# Altium PCB Test.PcbDoc (part 1 of 3)
Units mil, origin at the board's own origin, x right, y up, seen from the top; angles counter-clockwise.
Board outline 6000 x 4000 mil, 2 copper layers (Top Layer, Bottom Layer); 135 components, 102 nets, 575 pads, 1 vias.
Unrouted connection lines stored in the file: 317.
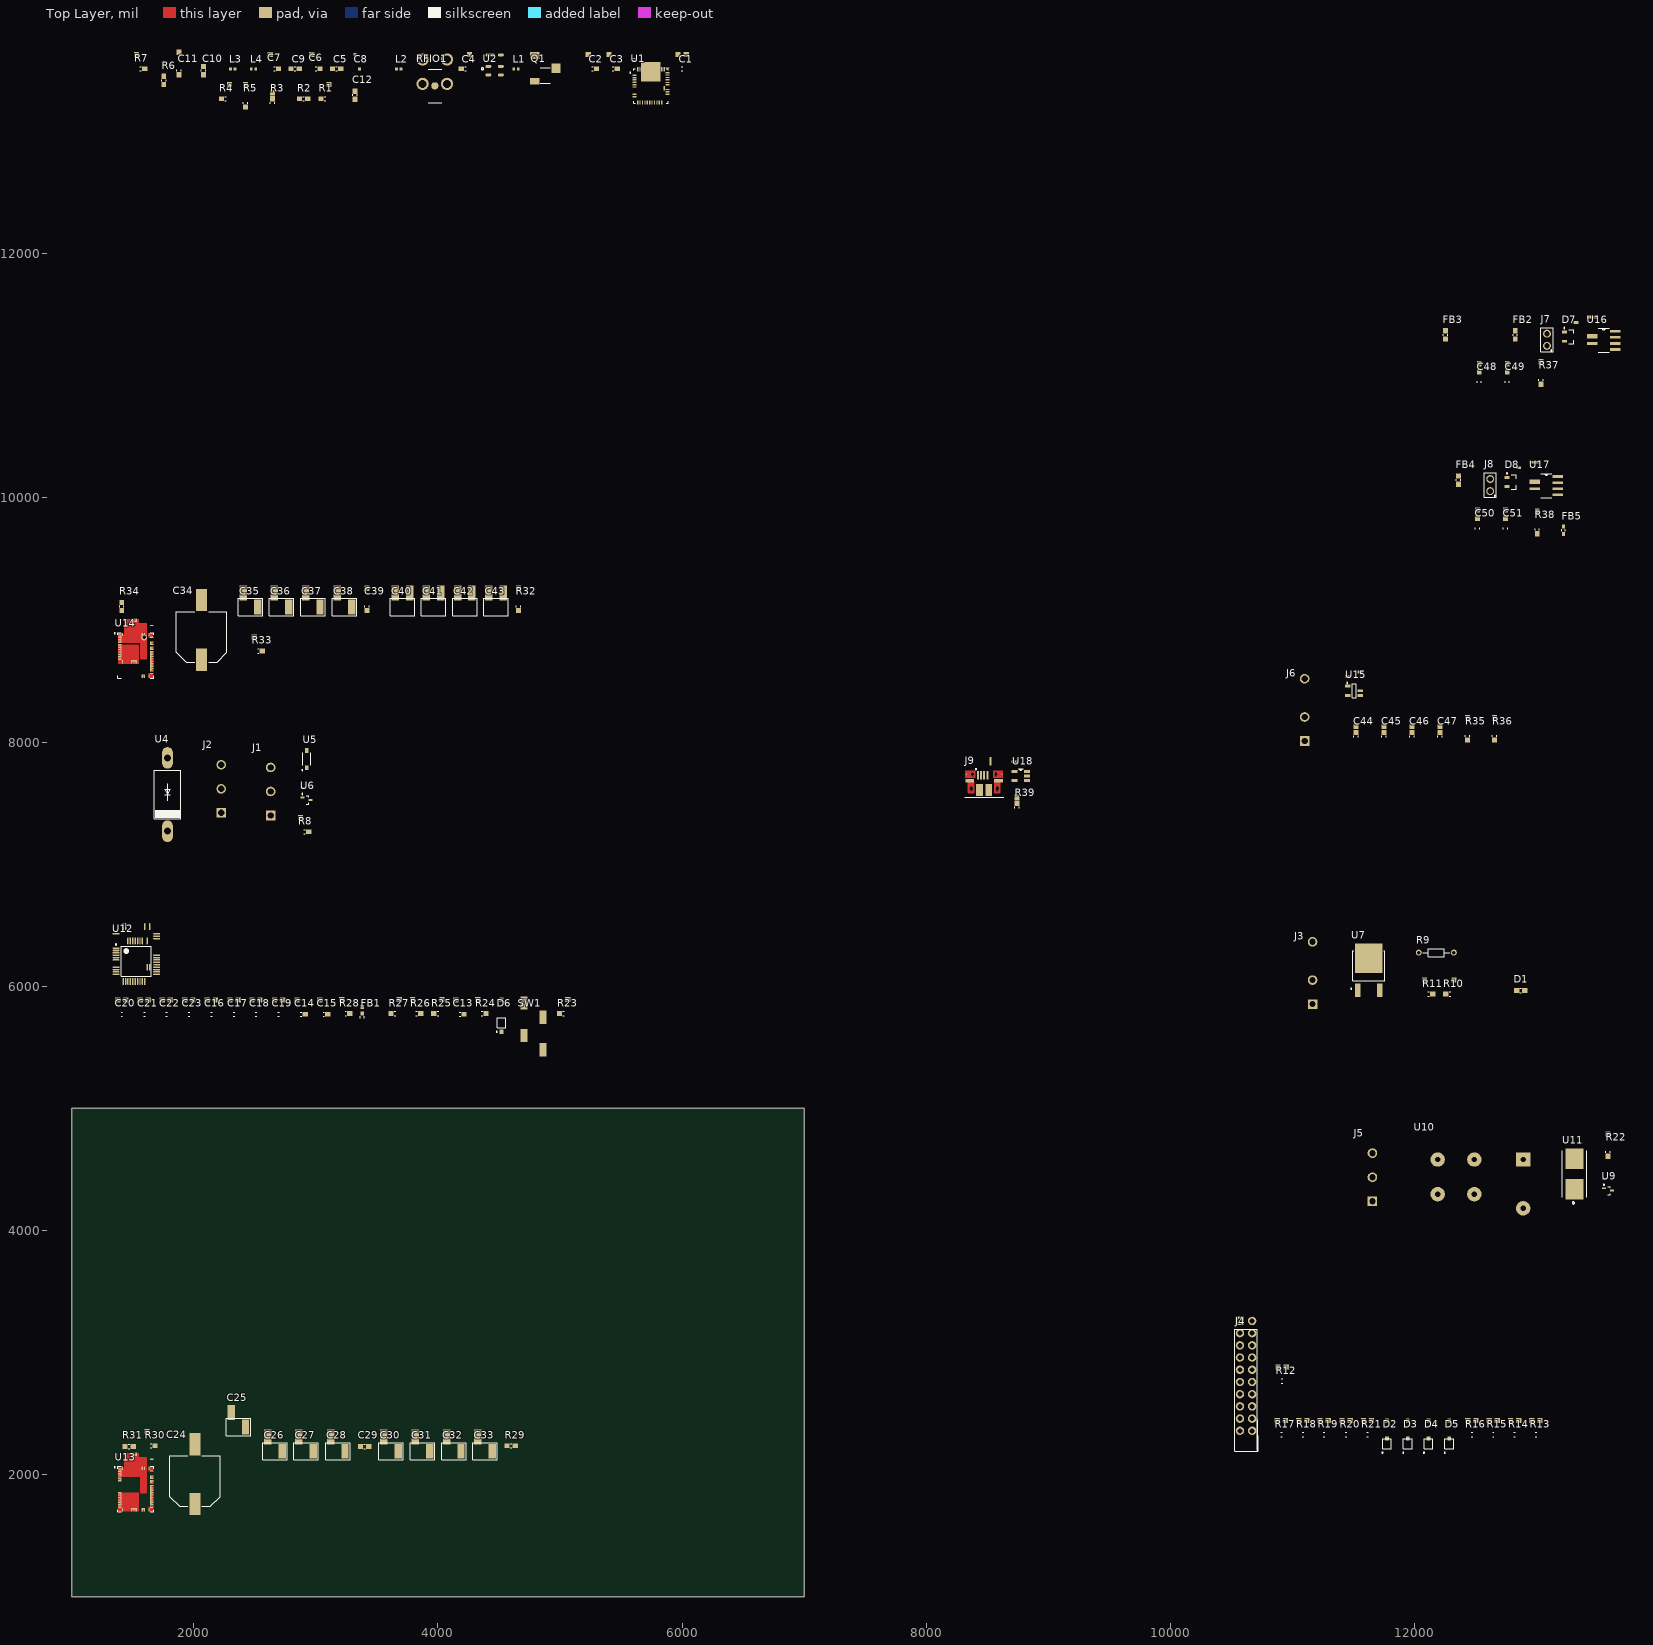
[diagram p0: Top Layer view]
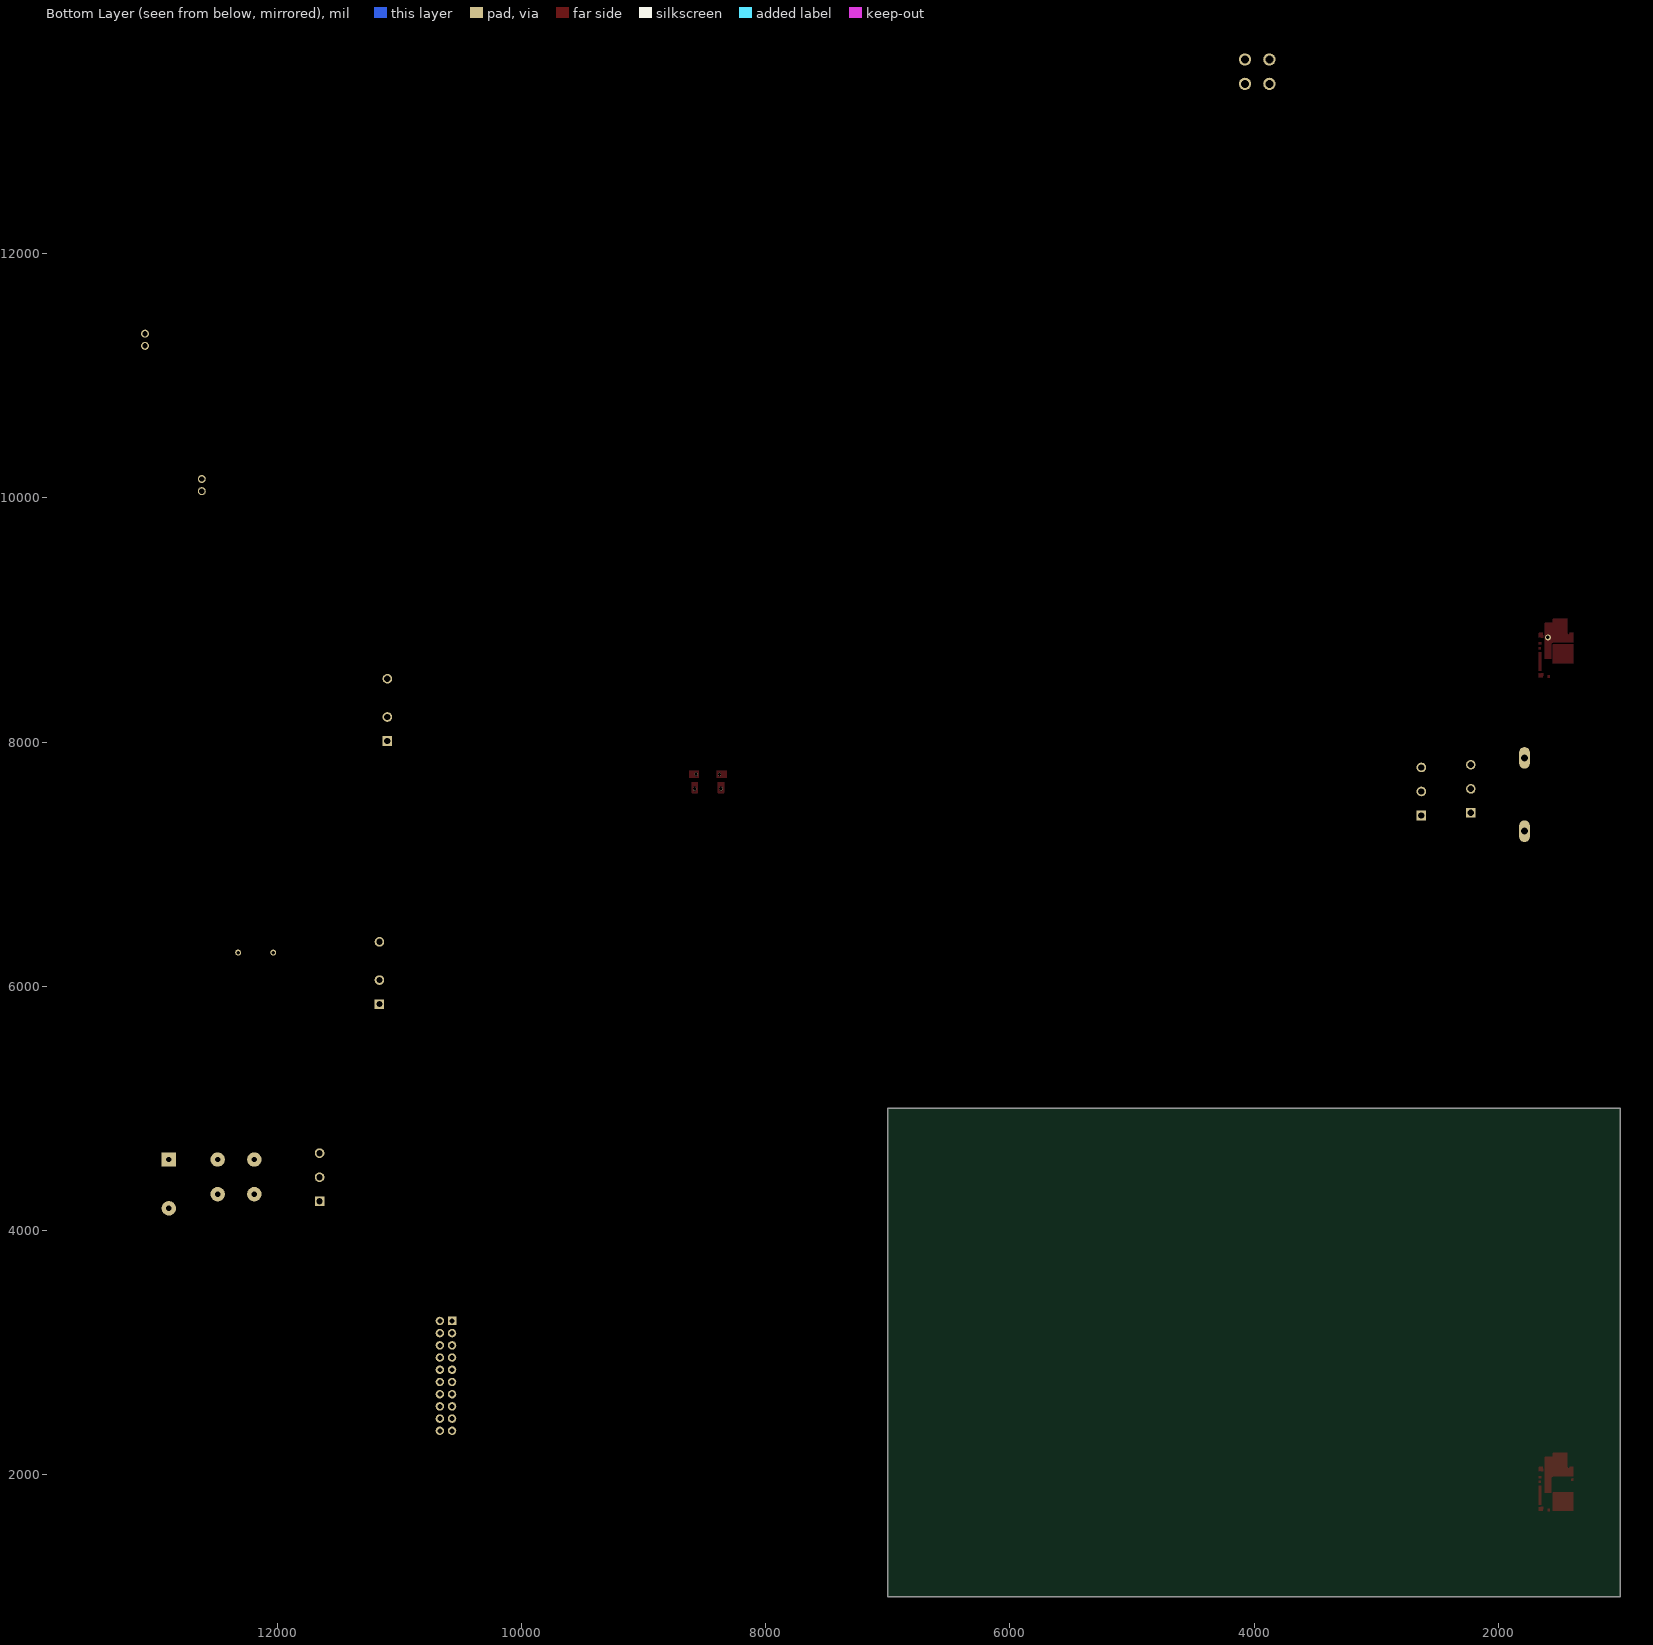
[diagram p1: Bottom Layer view, seen from below]

## Layer stack, top to bottom
Top Solder: solder mask 0.4, Solder Resist, Dk 3.5
Top Layer: signal copper 1.4
Dielectric 1: dielectric 12.6, FR-4, Dk 4.8
Bottom Layer: signal copper 1.4
Bottom Solder: solder mask 0.4, Solder Resist, Dk 3.5

## Board outline
1000,1000 7000,1000 7000,5000 1000,5000

## Design rules (kind name [scope] priority, off if disabled: settings)
Clearance [All] p1: gap=5 ignorepadtopadclearanceinfootprint=TRUE
MatchedLengths "Schematic Matched Net Lengths" [InNetClass('USBCLASS')] p1: tolerance=1 checknetsindiffpair=TRUE checkdiffpairvsdiffpair=FALSE checkxsignals=FALSE checkothers=FALSE
PolygonConnect [All] p1: connectstyle=Relief reliefconductorwidth=10 reliefentries=4 polygonreliefangle="90 Angle" airgapwidth=10
RoutingVias [All] p1: holewidth=28 width=50 viastyle="Through Hole" minholewidth=28 minwidth=50 maxholewidth=28 maxwidth=50
SolderMaskExpansion [All] p1: expansion=4
Width [All] p1: maxlimit=10 minlimit=10 preferedwidth=10
30 further rules are at their usual default settings.

## Classes and differential pairs
net class USBOCLASS: NetJ9_2 NetJ9_3
net class USBCLASS: NetU12_32 NetU12_33
component class USB: J6 R39 U18
component class Thermocouple: C30 C49 C50 C51 D2 D5 D6 FB1 FB2 FB3 FB4 J5 J6 J7 R28 R38 U16 U18
component class RFDesign: C1 C2 C3 C4 C5 C6 C7 C8 C9 C10 C11 C12 L1 L2 L3 L4 Q1 R4 R6 R7 R8 R10 R11 R12 RFIO1 U1 U2
component class PressureSensor: C28 C44 C45 C47 J6 R30 R39 U15
component class Power: C13 C14 C17 C20 C23 C28 C30 C33 C34 C36 C37 C39 C40 C42 C43 C44 C45 C46 C47 C48 C49 C50 R21 R28 R29 R30 R34 R39 U14 U15
component class MCU: C13 C14 C17 C20 C22 C23 C32 C33 C36 C37 C39 C40 C42 D6 R17 R21 R24 R25 R28 R29 R39 SW1 SW? U12
component class LightRelay: J7 R16 U9 U10 U11
component class JTAG: D2 D4 D5 D6 J4 R10 R13 R15 R16 R17 R18 R19 R21 R24 R25 R27 R39
component class InductiveSensor: D1 J3 R2 R4 R10 U7
component class FanPWM: J1 J2 R8 U4 U5 U6

## Components (designator, comment, footprint, x,y, rotation, side; value= is the part's Value field where it differs from the comment)
C1 "1uf_10V_0603" 0603#1 6000,13515 r0 top
C2 "1uf_10V_0603" 0603#2 5265,13515 r0 top
C3 "220nF_25V_0603" 0603#2 5435,13515 r0 top
C4 "NC_0603" 0603#3 4225,13515 r0 top
C5 "22pF_50V_0603" 0603#4 3170,13515 r0 top
C6 "1.8pF_50V_0603" 0603#2 3000,13515 r0 top
C7 "NC_0603" 0603#2 2660,13515 r0 top
C8 "Cap" 0402#1 3340,13515 r0 top value=4.7uf
C9 "680pF_50V_0603" 0603#4 2830,13515 r0 top
C10 "47nF_50V_0603" 0603#4 2080,13500 r90 top
C11 "100nF_50V_0603" 0603#5 1880,13500 r90 top
C12 "10nF_50V_0603" 0603#4 3320,13298.46 r90 top
C13 "100nF_50V_0603" 0603#2 4180,5770 r0 top
C14 "1uf_10V_0603" 0603#2 2880,5770 r0 top
C15 "100nF_50V_0603" 0603#2 3065,5770 r0 top
C16 "100nF_50V_0603" 0603#1 2145,5770 r0 top
C17 "100nF_50V_0603" 0603#1 2330,5770 r0 top
C18 "100nF_50V_0603" 0603#1 2510,5770 r0 top
C19 "100nF_50V_0603" 0603#1 2695,5770 r0 top
C20 "1uf_10V_0603" 0603#1 1410,5770 r0 top
C21 "1uf_10V_0603" 0603#1 1595,5770 r0 top
C22 "1uf_10V_0603" 0603#1 1775,5770 r0 top
C23 "1uf_10V_0603" 0603#1 1960,5770 r0 top
C24 "100uF_50V_smd_NC" CAPAE120103X105M 2010,1945 r90 top
C25 "10uF_50V_1210" 1210#1 2365,2390 r0 top
C26 "10uF_50V_1210" 1210#1 2665,2190 r0 top
C27 "4.7uf_50V_1210" 1210#1 2920,2190 r0 top
C28 "4.7uf_50V_1210" 1210#1 3180,2190 r0 top
C29 "100pF_50V_0603" 0603#4 3400,2230 r0 top
C30 "22uF_25V_1210" 1210#1 3615,2190 r0 top
C31 "22uF_25V_1210" 1210#1 3875,2190 r0 top
C32 "22uF_25V_1210" 1210#1 4130,2190 r0 top
C33 "22uF_25V_1210" 1210#1 4385,2190 r0 top
C34 "100uF_50V_smd_NC" CAPAE120103X105M 2065,8860 r90 top
C35 "10uF_50V_1210" 1210#1 2465,9105 r0 top
C36 "10uF_50V_1210" 1210#1 2720,9105 r0 top
C37 "4.7uf_50V_1210" 1210#1 2975,9105 r0 top
C38 "4.7uf_50V_1210" 1210#1 3235,9105 r0 top
C39 "150pF_50V_0603" 0603#5 3420,9110 r90 top
C40 "22uF_25V_1210" 1210#2 3710,9105 r0 top
C41 "22uF_25V_1210" 1210#2 3965,9105 r0 top
C42 "22uF_25V_1210" 1210#2 4220,9105 r0 top
C43 "47uF_16V_1210" 1210#2 4475,9105 r0 top
C44 "10nF_50V_0603" 0603#6 11520,8045 r90 top
C45 "100nF_50V_0603" 0603#6 11750,8045 r90 top
C46 "NC_0603" 0603#6 11980,8045 r90 top
C47 "NC_0603" 0603#6 12210,8045 r90 top
C48 "NC_0603" 0603#7 12530,10950 r90 top
C49 "100nF_50V_0603" 0603#7 12760,10950 r90 top
C50 "NC_0603" 0603#7 12515,9750 r90 top
C51 "100nF_50V_0603" 0603#7 12745,9750 r90 top
D1 "LTST-C191KRKT" 0603#4 12870,5965 r0 top
D2 "MMSZ5V1T1G" SOIC127P370X94-2N#1 11775,2251.38 r90 top
D3 "MMSZ5V1T1G" SOIC127P370X94-2N#1 11945,2251.38 r90 top
D4 "MMSZ5V1T1G" SOIC127P370X94-2N#1 12115,2251.38 r90 top
D5 "MMSZ5V1T1G" SOIC127P370X94-2N#1 12285,2251.38 r90 top
D6 "MMSZ5V1T1G" SOIC127P370X94-2N#2 4520,5700 r90 top
D7 "SZNUP2105LT1G" SOT-23-3 13275,11320 r0 top
D8 "SZNUP2105LT1G" SOT-23-3 12805,10130 r0 top
FB1 "600OHM_100MHz" 0603#8 3380,5745 r90 top
FB2 "470OHM_100MHZ" 0603#4 12825,11335 r90 top
FB3 "470OHM_100MHZ" 0603#4 12255,11335 r90 top
FB4 "470OHM_100MHZ" 0603#4 12360,10145 r90 top
FB5 "470OHM_100MHZ" 0603#9 13220,9735 r90 top
J1 "3PinTerminalBlock" "3 POS 5mm Pitch"#1 2630,7398.15 r90 top
J2 "3PinTerminalBlock" "3 POS 5mm Pitch"#1 2225,7420 r90 top
J3 "3PinTerminalBlock" "3 POS 5mm Pitch"#2 11165,5853.15 r90 top
J4 "20Pin JTag" DIP20 10570,3141.38 r0 top
J5 "3PinTerminalBlock" "3 POS 5mm Pitch"#1 11655,4238.15 r90 top
J6 "3PinTerminalBlock" "3 POS 5mm Pitch"#2 11100,8008.15 r90 top
J7 "2PinTerminalBlock" "2 Pos 2.54mm Pitch" 13085,11295 r90 top
J8 "2PinTerminalBlock" "2 Pos 2.54mm Pitch" 12620,10105 r90 top
J9 "USB MICRO B" 10103594-0001LF 8475,7616.54 r0 top
L1 "100nH_0402" 0402#2 4640,13515 r0 top
L2 "8.2nH_0402_Q8" 0402#2 3680,13515 r0 top
L3 "8.2nH_0402" 0402#2 2320,13515 r0 top
L4 "8.2nH_0402" 0402#2 2490,13515 r0 top
Q1 "Crystal_12_8" "4-SMD No Lead" 4880,13460 r0 top
R1 "100k_0603" 0603#3 3075,13270 r0 top
R2 "NC_0603" 0603#4 2900,13270 r0 top
R3 "NC_0603" 0603#6 2645,13235 r90 top
R4 "10k_0603" 0603#3 2260,13270 r0 top
R5 "10k_0603" 0603#5 2425,13235 r90 top
R6 "6.8k_0603" 0603#4 1755,13420 r90 top
R7 "1_0603" 0603#2 1565,13515 r0 top
R8 "110_0603" 0603#2 2908.46,7265 r0 top
R9 "560_7.3mmTH" "7.3mm Through Hole" 12178.7,6275 r180 top
R10 "NC_0603" 0603#3 12290,5935 r0 top
R11 "68_0603" 0603#2 12115,5935 r0 top
R12 "NC_0603" 0603#1 10915,2765 r0 top
R13 "22_0603" 0603#1 12995,2326.38 r0 top
R14 "22_0603" 0603#1 12820,2326.38 r0 top
R15 "22_0603" 0603#1 12645,2326.38 r0 top
R16 "22_0603" 0603#1 12470,2326.38 r0 top
R17 "10k_0603" 0603#1 10910,2326.38 r0 top
R18 "10k_0603" 0603#1 11085,2326.38 r0 top
R19 "10k_0603" 0603#1 11260,2326.38 r0 top
R20 "10k_0603" 0603#1 11440,2326.38 r0 top
R21 "10k_0603" 0603#1 11615,2326.38 r0 top
R22 "10_0603" 0603#5 13585,4640 r90 top
R23 "NC_0603" 0603#3 5030,5775 r0 top
R24 "22_0603" 0603#2 4360,5775 r0 top
R25 "22_0603" 0603#3 4000,5775 r0 top
R26 "NC_0603" 0603#2 3825,5775 r0 top
R27 "10k_0603" 0603#3 3650,5775 r0 top
R28 "10k_0603" 0603#2 3245,5775 r0 top
R29 "40.2K_0603" 0603#4 4600,2235 r0 top
R30 "88.7K_0603" 0603#2 1650,2235 r0 top
R31 "10k_0603" 0603#4 1470,2230 r0 top
R32 "23.2k_0603" 0603#5 4660,9110 r90 top
R33 "133k_0603" 0603#2 2528.46,8745 r0 top
R34 "10k_0603" 0603#4 1410,9110 r90 top
R35 "10k_0603" 0603#5 12435,8050 r90 top
R36 "10k_0603" 0603#5 12655,8050 r90 top
R37 "10k_0603" 0603#5 13035,10965 r90 top
R38 "10k_0603" 0603#5 13005,9740 r90 top
R39 "15k_0603" 0603#6 8745,7465 r90 top
RFIO1 "SMA Straight PCB" "SMA Straight PCB" 3975,13375 r0 top
SW1 "B3SN-3012P" B3SN-3012P 4775,5610 r90 top
U1 "SX1211" ADF7021BCPZ 5745,13375 r0 top
U2 "B39871B3715U410" B39871B3715U410 4465,13465 r0 top
U4 "SB5100" SB5100 1785,7570 r90 top
U5 "1N5819HW-7-F" 1N5819HW-7-F 2925,7860.87 r90 top
U6 "DMG1012T-7" DMG1012T-7 2923.46,7525.31 r0 top
U7 "N-Mosfet" FQD1N80TM 11625,6130 r0 top
U9 "DMG1012T-7" DMG1012T-7 13585,4325 r0 top
U10 "G6C-2114P-US" G6C-2114P-US 12890,4580 r270 top
U11 "2A_125VAC" 2410 13310,4460.59 r90 top
U12 "STM32L4" TSQFP50P900X900X160-48N 1530,6205 r0 top
U13 "LMZM33602" QFN50P700X900X410_HS-55N#1 1525,1880 r0 top
U14 "LMZM33602" QFN50P700X900X410_HS-55N#2 1525,8710 r0 top
U15 "ADS1100A0IDBVR" ADS1100A0IDBVR 11505,8420 r0 top
U16 "MAX31855KASA+T" MAX31855KASA+T 13550,11290 r0 top
U17 "MAX31855KASA+T" MAX31855KASA+T 13080,10100 r0 top
U18 "TPD2S017DBVR" SOT95P280X145-6N 8775,7721.54 r0 top

## Footprints (in the part's own frame and the unit in brackets; to place one, negate y for a bottom-side part, rotate by r counter-clockwise, add the part's x,y. Pads: shape width x height; smd on the part's side, far side on the other; paste and mask are expansions set on the pad)
1N5819HW-7-F [mm]
  rect 1x0.75 smd: A(1.8,0) C(-1.8,0)
  silkscreen extent -2.4,-0.8 1.35,0.97
"2 Pos 2.54mm Pitch" [mm]
  round 1.65 hole 1.1: 1(-1.27,0) 2(1.27,0)
  silkscreen extent -2.54,-1.27 2.54,1.27
"3 POS 5mm Pitch"#1 [mm]
  rect 2x2 hole 1.3: 1(0,0)
  round 2 hole 1.3: 2(5,0) 3(10,0)
"3 POS 5mm Pitch"#2 [mm]
  rect 2x2 hole 1.3: 1(0,0)
  round 2 hole 1.3: 2(5,0) 3(12.956,0)
"4-SMD No Lead" [mm]
  rect 1.9x1.4 smd: 1(-2.2,-1.2) 2(2.2,1.756) 3(2.2,1.2) 4(-2.2,4.156)
  silkscreen extent -1.05,-1.65 1.05,1.65
"7.3mm Through Hole" [mm]
  round 1.238 hole 0.73: 1(-3.65,0) 2(3.65,0)
  silkscreen extent -2.8,-0.85 2.8,0.85
0402#1 [mm]
  rect 0.58x0.62 smd: 1(-0.47,2.956) 2(0.47,0)
0402#2 [mm]
  rect 0.58x0.62 smd: 1(-0.47,0) 2(0.47,0)
0603#1 [mm]
  rect 1.1x1 smd: 1(-0.85,2.956) 2(0.85,2.956)
  silkscreen extent -0.15,-0.45 0.15,0.45
0603#2 [mm]
  rect 1.1x1 smd: 1(-0.85,2.956) 2(0.85,0)
  silkscreen extent -0.15,-0.45 0.15,0.45
0603#3 [mm]
  rect 1.1x1 smd: 1(-0.85,0) 2(0.85,2.956)
  silkscreen extent -0.15,-0.45 0.15,0.45
0603#4 [mm]
  rect 1.1x1 smd: 1(-0.85,0) 2(0.85,0)
  silkscreen extent -0.15,-0.45 0.15,0.45
0603#5 [mm]
  rect 1.1x1 smd: 1(-0.85,0) 2(3.806,0)
  silkscreen extent -0.15,-0.45 0.15,0.45
0603#6 [mm]
  rect 1.1x1 smd: 1(2.106,0) 2(0.85,0)
  silkscreen extent -0.15,-0.45 0.15,0.45
0603#7 [mm]
  rect 1.1x1 smd: 1(2.106,0) 2(3.806,0)
  silkscreen extent -0.15,-0.45 0.15,0.45
0603#8 [mm]
  rect 0.85x0.7 smd: 1(2.181,0) 2(0.775,0)
  silkscreen extent -0.2,-0.4 0.2,0.4
0603#9 [mm]
  rect 0.85x0.7 smd: 1(-0.775,0) 2(0.775,0)
  silkscreen extent -0.2,-0.4 0.2,0.4
1210#1 [mm]
  rect 1.55x3.1 smd: 1(-1.5,2.956) 2(1.5,0)
  silkscreen extent -2.55,-1.8 2.55,1.8
1210#2 [mm]
  rect 1.55x3.1 smd: 1(-1.5,2.956) 2(1.5,2.956)
  silkscreen extent -2.55,-1.8 2.55,1.8
2410 [mm]
  rect 4.24x3.81 smd: 1(-3.19,0) 2(3.19,0)
  silkscreen extent -6.22,-2.51 4.86,2.51, body extent -3.17,-1.32 3.17,1.32, height 2.64
10103594-0001LF [mm]
  rect 0.4x1.75 smd: 1(-1.3,2.825) 2(-0.65,2.825) 3(0,2.825) 4(0.65,2.825) 5(1.3,5.781)
  round 0.7 hole 0.7 unplated: None(-2.725,0) None(2.725,0)
  round 0.65 hole 0.65 unplated: None(-2.425,3.03) None(2.425,3.03)
  rect 0.1x0.1 smd: P1(-3.7,3) P2(3.7,3)
  rect 1.825x0.7 smd: P3(-2.987,1.7) P4(2.987,1.7)
  rect 1.425x2.5 smd: P5(-0.963,-0.25) P6(0.963,-0.25)
  Top Layer region: -2.725,0.605 -2.725,1.35 -2.075,1.35 -2.075,-0.66 -2.075,-0.666 -2.076,-0.679 -2.077,-0.691 -2.079,-0.704 -2.082,-0.716 -2.085,-0.728 -2.089,-0.74 -2.093,-0.752 -2.098,-0.763 -2.104,-0.775 -2.11,-0.785 -2.117,-0.796 -2.125,-0.806 -2.132,-0.816 -2.141,-0.825 -2.15,-0.834 -2.159,-0.843 -2.169,-0.85 -2.179,-0.858 -2.19,-0.865 -2.2,-0.871 -2.212,-0.877 -2.223,-0.882 -2.235,-0.886 -2.247,-0.89 -2.259,-0.893 -2.271,-0.896 -2.284,-0.898 -2.296,-0.899 -2.309,-0.9 -2.315,-0.9 -2.725,-0.9 -2.725,-0.605 -2.716,-0.605 -2.697,-0.604 -2.679,-0.602 -2.66,-0.599 -2.642,-0.595 -2.624,-0.59 -2.606,-0.585 -2.589,-0.578 -2.572,-0.571 -2.556,-0.562 -2.539,-0.553 -2.524,-0.543 -2.509,-0.532 -2.494,-0.52 -2.481,-0.508 -2.467,-0.494 -2.455,-0.481 -2.443,-0.466 -2.432,-0.451 -2.422,-0.436 -2.413,-0.419 -2.404,-0.403 -2.397,-0.386 -2.39,-0.369 -2.385,-0.351 -2.38,-0.333 -2.376,-0.315 -2.373,-0.296 -2.371,-0.278 -2.37,-0.259 -2.37,-0.25 -2.37,0 -2.37,0.25 -2.37,0.259 -2.371,0.278 -2.373,0.296 -2.376,0.315 -2.38,0.333 -2.385,0.351 -2.39,0.369 -2.397,0.386 -2.404,0.403 -2.413,0.419 -2.422,0.436 -2.432,0.451 -2.443,0.466 -2.455,0.481 -2.467,0.494 -2.481,0.508 -2.494,0.52 -2.509,0.532 -2.524,0.543 -2.539,0.553 -2.556,0.562 -2.572,0.571 -2.589,0.578 -2.606,0.585 -2.624,0.59 -2.642,0.595 -2.66,0.599 -2.679,0.602 -2.697,0.604 -2.716,0.605 -2.725,0.605
  Top Layer region: -2.725,-0.605 -2.725,-0.9 -3.135,-0.9 -3.145,-0.9 -3.151,-0.9 -3.163,-0.899 -3.175,-0.898 -3.187,-0.896 -3.199,-0.894 -3.21,-0.891 -3.222,-0.887 -3.233,-0.883 -3.244,-0.878 -3.255,-0.872 -3.265,-0.866 -3.275,-0.86 -3.285,-0.853 -3.294,-0.845 -3.303,-0.837 -3.312,-0.828 -3.32,-0.819 -3.328,-0.81 -3.335,-0.8 -3.341,-0.79 -3.347,-0.78 -3.353,-0.769 -3.358,-0.758 -3.362,-0.747 -3.366,-0.735 -3.369,-0.724 -3.371,-0.712 -3.373,-0.7 -3.374,-0.688 -3.375,-0.676 -3.375,-0.67 -3.375,1.12 -3.375,1.126 -3.374,1.138 -3.373,1.15 -3.371,1.162 -3.369,1.174 -3.366,1.185 -3.362,1.197 -3.358,1.208 -3.353,1.219 -3.347,1.23 -3.341,1.24 -3.335,1.25 -3.328,1.26 -3.32,1.269 -3.312,1.278 -3.303,1.287 -3.294,1.295 -3.285,1.303 -3.275,1.31 -3.265,1.316 -3.255,1.322 -3.244,1.328 -3.233,1.333 -3.222,1.337 -3.21,1.341 -3.199,1.344 -3.187,1.346 -3.175,1.348 -3.163,1.349 -3.151,1.35 -3.145,1.35 -3.14,1.35 -2.725,1.35 -2.725,0.605 -2.734,0.605 -2.753,0.604 -2.771,0.602 -2.79,0.599 -2.808,0.595 -2.826,0.59 -2.844,0.585 -2.861,0.578 -2.878,0.571 -2.894,0.562 -2.911,0.553 -2.926,0.543 -2.941,0.532 -2.956,0.52 -2.969,0.508 -2.983,0.494 -2.995,0.481 -3.007,0.466 -3.018,0.451 -3.028,0.436 -3.037,0.419 -3.046,0.403 -3.053,0.386 -3.06,0.369 -3.066,0.351 -3.07,0.333 -3.074,0.315 -3.077,0.296 -3.079,0.278 -3.08,0.259 -3.08,0.25 -3.08,0 -3.08,-0.25 -3.08,-0.259 -3.079,-0.278 -3.077,-0.296 -3.074,-0.315 -3.07,-0.333 -3.066,-0.351 -3.06,-0.369 -3.053,-0.386 -3.046,-0.403 -3.037,-0.419 -3.028,-0.436 -3.018,-0.451 -3.007,-0.466 -2.995,-0.481 -2.983,-0.494 -2.969,-0.508 -2.956,-0.52 -2.941,-0.532 -2.926,-0.543 -2.911,-0.553 -2.894,-0.562 -2.878,-0.571 -2.861,-0.578 -2.844,-0.585 -2.826,-0.59 -2.808,-0.595 -2.79,-0.599 -2.771,-0.602 -2.753,-0.604 -2.734,-0.605 -2.725,-0.605
  Top Layer region: -3.375,1.12 -3.375,1.35 -3.135,1.35 -3.135,1.12
  Top Layer region: 2.725,0.605 2.725,1.35 3.375,1.35 3.375,-0.66 3.375,-0.666 3.374,-0.679 3.373,-0.691 3.371,-0.704 3.368,-0.716 3.365,-0.728 3.361,-0.74 3.357,-0.752 3.352,-0.763 3.346,-0.775 3.34,-0.785 3.333,-0.796 3.325,-0.806 3.318,-0.816 3.309,-0.825 3.3,-0.834 3.291,-0.843 3.281,-0.85 3.271,-0.858 3.26,-0.865 3.25,-0.871 3.238,-0.877 3.227,-0.882 3.215,-0.886 3.203,-0.89 3.191,-0.893 3.179,-0.896 3.166,-0.898 3.154,-0.899 3.141,-0.9 3.135,-0.9 2.725,-0.9 2.725,-0.605 2.734,-0.605 2.753,-0.604 2.771,-0.602 2.79,-0.599 2.808,-0.595 2.826,-0.59 2.844,-0.585 2.861,-0.578 2.878,-0.571 2.894,-0.562 2.911,-0.553 2.926,-0.543 2.941,-0.532 2.956,-0.52 2.969,-0.508 2.983,-0.494 2.995,-0.481 3.007,-0.466 3.018,-0.451 3.028,-0.436 3.037,-0.419 3.046,-0.403 3.053,-0.386 3.06,-0.369 3.066,-0.351 3.07,-0.333 3.074,-0.315 3.077,-0.296 3.079,-0.278 3.08,-0.259 3.08,-0.25 3.08,0 3.08,0.25 3.08,0.259 3.079,0.278 3.077,0.296 3.074,0.315 3.07,0.333 3.066,0.351 3.06,0.369 3.053,0.386 3.046,0.403 3.037,0.419 3.028,0.436 3.018,0.451 3.007,0.466 2.995,0.481 2.983,0.494 2.969,0.508 2.956,0.52 2.941,0.532 2.926,0.543 2.911,0.553 2.894,0.562 2.878,0.571 2.861,0.578 2.844,0.585 2.826,0.59 2.808,0.595 2.79,0.599 2.771,0.602 2.753,0.604 2.734,0.605 2.725,0.605
  Top Layer region: 2.725,-0.605 2.725,-0.9 2.315,-0.9 2.305,-0.9 2.299,-0.9 2.287,-0.899 2.275,-0.898 2.263,-0.896 2.251,-0.894 2.24,-0.891 2.228,-0.887 2.217,-0.883 2.206,-0.878 2.195,-0.872 2.185,-0.866 2.175,-0.86 2.165,-0.853 2.156,-0.845 2.147,-0.837 2.138,-0.828 2.13,-0.819 2.122,-0.81 2.115,-0.8 2.109,-0.79 2.103,-0.78 2.097,-0.769 2.092,-0.758 2.088,-0.747 2.084,-0.735 2.081,-0.724 2.079,-0.712 2.077,-0.7 2.076,-0.688 2.075,-0.676 2.075,-0.67 2.075,1.12 2.075,1.126 2.076,1.138 2.077,1.15 2.079,1.162 2.081,1.174 2.084,1.185 2.088,1.197 2.092,1.208 2.097,1.219 2.103,1.23 2.109,1.24 2.115,1.25 2.122,1.26 2.13,1.269 2.138,1.278 2.147,1.287 2.156,1.295 2.165,1.303 2.175,1.31 2.185,1.316 2.195,1.322 2.206,1.328 2.217,1.333 2.228,1.337 2.24,1.341 2.251,1.344 2.263,1.346 2.275,1.348 2.287,1.349 2.299,1.35 2.305,1.35 2.31,1.35 2.725,1.35 2.725,0.605 2.716,0.605 2.697,0.604 2.679,0.602 2.66,0.599 2.642,0.595 2.624,0.59 2.606,0.585 2.589,0.578 2.572,0.571 2.556,0.562 2.539,0.553 2.524,0.543 2.509,0.532 2.494,0.52 2.481,0.508 2.467,0.494 2.455,0.481 2.443,0.466 2.432,0.451 2.422,0.436 2.413,0.419 2.404,0.403 2.397,0.386 2.39,0.369 2.385,0.351 2.38,0.333 2.376,0.315 2.373,0.296 2.371,0.278 2.37,0.259 2.37,0.25 2.37,0 2.37,-0.25 2.37,-0.259 2.371,-0.278 2.373,-0.296 2.376,-0.315 2.38,-0.333 2.385,-0.351 2.39,-0.369 2.397,-0.386 2.404,-0.403 2.413,-0.419 2.422,-0.436 2.432,-0.451 2.443,-0.466 2.455,-0.481 2.467,-0.494 2.481,-0.508 2.494,-0.52 2.509,-0.532 2.524,-0.543 2.539,-0.553 2.556,-0.562 2.572,-0.571 2.589,-0.578 2.606,-0.585 2.624,-0.59 2.642,-0.595 2.66,-0.599 2.679,-0.602 2.697,-0.604 2.716,-0.605 2.725,-0.605
  Top Layer region: 2.075,1.12 2.075,1.35 2.315,1.35 2.315,1.12
  Top Layer region: -2.425,3.56 -2.425,3.76 -1.9,3.76 -1.9,2.3 -2.425,2.3 -2.425,2.5 -2.416,2.5 -2.399,2.501 -2.382,2.503 -2.365,2.505 -2.348,2.509 -2.331,2.513 -2.315,2.519 -2.299,2.525 -2.283,2.532 -2.267,2.54 -2.253,2.549 -2.238,2.558 -2.224,2.568 -2.211,2.579 -2.198,2.591 -2.186,2.603 -2.174,2.616 -2.163,2.629 -2.153,2.643 -2.144,2.658 -2.135,2.672 -2.127,2.688 -2.12,2.704 -2.114,2.72 -2.108,2.736 -2.104,2.753 -2.1,2.77 -2.098,2.787 -2.096,2.804 -2.095,2.821 -2.095,2.83 -2.095,3.03 -2.095,3.23 -2.095,3.239 -2.096,3.256 -2.098,3.273 -2.1,3.29 -2.104,3.307 -2.108,3.324 -2.114,3.34 -2.12,3.356 -2.127,3.372 -2.135,3.388 -2.144,3.402 -2.153,3.417 -2.163,3.431 -2.174,3.444 -2.186,3.457 -2.198,3.469 -2.211,3.481 -2.224,3.492 -2.238,3.502 -2.253,3.511 -2.267,3.52 -2.283,3.528 -2.299,3.535 -2.315,3.541 -2.331,3.547 -2.348,3.551 -2.365,3.555 -2.382,3.557 -2.399,3.559 -2.416,3.56 -2.425,3.56
  Top Layer region: -2.425,3.56 -2.425,3.76 -3.9,3.76 -3.9,2.3 -2.425,2.3 -2.425,2.5 -2.434,2.5 -2.451,2.501 -2.468,2.503 -2.485,2.505 -2.502,2.509 -2.519,2.513 -2.535,2.519 -2.551,2.525 -2.567,2.532 -2.583,2.54 -2.597,2.549 -2.612,2.558 -2.626,2.568 -2.639,2.579 -2.652,2.591 -2.664,2.603 -2.676,2.616 -2.687,2.629 -2.697,2.643 -2.706,2.658 -2.715,2.672 -2.723,2.688 -2.73,2.704 -2.736,2.72 -2.742,2.736 -2.746,2.753 -2.75,2.77 -2.752,2.787 -2.754,2.804 -2.755,2.821 -2.755,2.83 -2.755,3.03 -2.755,3.23 -2.755,3.239 -2.754,3.256 -2.752,3.273 -2.75,3.29 -2.746,3.307 -2.742,3.324 -2.736,3.34 -2.73,3.356 -2.723,3.372 -2.715,3.388 -2.706,3.402 -2.697,3.417 -2.687,3.431 -2.676,3.444 -2.664,3.457 -2.652,3.469 -2.639,3.481 -2.626,3.492 -2.612,3.502 -2.597,3.511 -2.583,3.52 -2.567,3.528 -2.551,3.535 -2.535,3.541 -2.519,3.547 -2.502,3.551 -2.485,3.555 -2.468,3.557 -2.451,3.559 -2.434,3.56 -2.425,3.56
  Top Layer region: 2.425,2.5 2.425,2.3 1.9,2.3 1.9,3.76 2.425,3.76 2.425,3.56 2.416,3.56 2.399,3.559 2.382,3.557 2.365,3.555 2.348,3.551 2.331,3.547 2.315,3.541 2.299,3.535 2.283,3.528 2.267,3.52 2.253,3.511 2.238,3.502 2.224,3.492 2.211,3.481 2.198,3.469 2.186,3.457 2.174,3.444 2.163,3.431 2.153,3.417 2.144,3.402 2.135,3.388 2.127,3.372 2.12,3.356 2.114,3.34 2.108,3.324 2.104,3.307 2.1,3.29 2.098,3.273 2.096,3.256 2.095,3.239 2.095,3.23 2.095,3.03 2.095,2.83 2.095,2.821 2.096,2.804 2.098,2.787 2.1,2.77 2.104,2.753 2.108,2.736 2.114,2.72 2.12,2.704 2.127,2.688 2.135,2.672 2.144,2.658 2.153,2.643 2.163,2.629 2.174,2.616 2.186,2.603 2.198,2.591 2.211,2.579 2.224,2.568 2.238,2.558 2.253,2.549 2.267,2.54 2.283,2.532 2.299,2.525 2.315,2.519 2.331,2.513 2.348,2.509 2.365,2.505 2.382,2.503 2.399,2.501 2.416,2.5 2.425,2.5
  Top Layer region: 2.425,2.5 2.425,2.3 3.9,2.3 3.9,3.76 2.425,3.76 2.425,3.56 2.434,3.56 2.451,3.559 2.468,3.557 2.485,3.555 2.502,3.551 2.519,3.547 2.535,3.541 2.551,3.535 2.567,3.528 2.583,3.52 2.597,3.511 2.612,3.502 2.626,3.492 2.639,3.481 2.652,3.469 2.664,3.457 2.676,3.444 2.687,3.431 2.697,3.417 2.706,3.402 2.715,3.388 2.723,3.372 2.73,3.356 2.736,3.34 2.742,3.324 2.746,3.307 2.75,3.29 2.752,3.273 2.754,3.256 2.755,3.239 2.755,3.23 2.755,3.03 2.755,2.83 2.755,2.821 2.754,2.804 2.752,2.787 2.75,2.77 2.746,2.753 2.742,2.736 2.736,2.72 2.73,2.704 2.723,2.688 2.715,2.672 2.706,2.658 2.697,2.643 2.687,2.629 2.676,2.616 2.664,2.603 2.652,2.591 2.639,2.579 2.626,2.568 2.612,2.558 2.597,2.549 2.583,2.54 2.567,2.532 2.551,2.525 2.535,2.519 2.519,2.513 2.502,2.509 2.485,2.505 2.468,2.503 2.451,2.501 2.434,2.5 2.425,2.5
  silkscreen extent -4.02,-1.7 4.02,4.23
ADF7021BCPZ [mm]
  rect 4.08x4.08 smd: 0(0,2.956)
  rect 0.88x0.26 smd: 1(-3.435,5.706) 2(-3.435,5.206) 3(-3.435,1.75) 4(-3.435,1.25) 5(-3.435,0.75) 6(-3.435,0.25) 7(-3.435,-0.25) 8(-3.435,2.206) 9(-3.435,1.706) 10(-3.435,-1.75) 11(-3.435,-2.25) 12(-3.435,0.206) 25(3.435,0.206) 26(3.435,0.706) 27(3.435,-1.75) 28(3.435,-1.25) 29(3.435,-0.75) 30(3.435,2.706) 31(3.435,0.25) 32(3.435,3.706) 33(3.435,1.25) 34(3.435,1.75) 35(3.435,2.25) 36(3.435,2.75)
  rect 0.26x0.88 smd: 13(-2.75,-3.435) 14(-2.25,-3.435) 15(-1.75,-3.435) 16(-1.25,-3.435) 17(-0.75,-3.435) 18(-0.25,-3.435) 19(0.25,-3.435) 20(0.75,-3.435) 21(1.25,-3.435) 22(1.75,-3.435) 23(2.25,-3.435) 24(2.75,-0.479) 37(2.75,3.435) 38(2.25,3.435) 39(1.75,3.435) 40(1.25,3.435) 41(0.75,3.435) 42(0.25,3.435) 43(-0.25,3.435) 44(-0.75,3.435) 45(-1.25,3.435) 46(-1.75,3.435) 47(-2.25,3.435) 48(-2.75,3.435)
  silkscreen extent -4.39,-3.58 3.58,3.58
ADS1100A0IDBVR [mm]
  rect 1.1x0.6 smd: 1(-1.3,0.95) 2(-1.3,2.956) 3(-1.3,-0.95) 4(1.3,-0.95) 5(1.3,0) 6(1.3,3.906)
  silkscreen extent -1.57,-1.45 0.43,1.74
B3SN-3012P [mm]
  rect 2.75x1.45 smd: 1(3.426,-2.135) 2(-3.324,-2.135) 3(6.382,1.815) 4(-0.368,1.815)
  body extent -3.52,-3.68 3.48,3.32, height 3.1
B39871B3715U410 [mm]
  oval 1.96x0.65 smd: 1(-0.93,4.156)
  oval 1.2x0.65 smd: 2(-1.3,0) 3(-1.3,1.756) 4(1.3,1.756) 5(1.3,0) 6(1.3,4.156)
  silkscreen extent -2.77,1.03 -2.31,1.49
CAPAE120103X105M [mm] "Aluminum Electrolytic Capacitor, Body 10.30x10.30x10.50mm, IPC Low Density"
  rect 4.65x2.3 smd: 1(-4.75,0) 2(7.706,0)
  silkscreen extent -5.25,-5.25 5.25,5.25, body extent -5.25,-5.25 5.25,5.25, height 10.5
DIP20 [mm]
  rect 1.75x1.75 hole 1.02: 1(0,2.956)
  round 1.75 hole 1.02: 2(0,0.416) 3(0,-2.124) 4(0,-4.664) 5(0,-7.204) 6(0,-9.744) 7(0,-12.284) 8(0,-14.824) 9(0,-17.364) 10(0,-19.904) 11(2.54,-19.904) 12(2.54,-17.364) 13(2.54,-14.824) 14(2.54,-12.284) 15(2.54,-9.744) 16(2.54,-7.204) 17(2.54,-4.664) 18(2.54,-2.124) 19(2.54,0.416) 20(2.54,2.956)
  silkscreen extent -1.07,-24.13 3.68,1.27
DMG1012T-7 [mm] "SOT23, 3-Leads, Body 1.60x1.60mm, Pitch 0.50mm, IPC Medium Density"
  rect 0.85x0.4 smd: 1(-0.85,0.5) 2(-0.85,2.456) 3(0.85,0)
  silkscreen extent -0.97,-0.85 0.43,1.37, body extent -0.43,-0.85 0.43,0.85, height 0.9
FQD1N80TM [mm]
  rect 1.22x2.83 smd: 1(-2.29,-4.14) 3(2.29,-4.14)
  rect 5.63x6.1 smd: 4(0,2.51)
  silkscreen extent -3.79,-3.99 3.37,4.1
G6C-2114P-US [mm]
  rect 3x3 hole 1.1: 1(0,0)
  round 3 hole 1.1: 3(0,-10.16) 4(0,-17.78) 5(7.204,-17.78) 6(7.204,-10.16) 8(10.16,0)
MAX31855KASA+T [mil]
  rect 86x22 smd: 1(-93,191.38) 2(-93,25) 3(-93,-25) 4(-93,41.38) 5(93,-75) 6(93,-25) 7(93,25) 8(93,75)
  silkscreen extent -46,-98 46,99
QFN50P700X900X410_HS-55N#1 [mm] "QFN, 54-Leads, Body 7.00x9.00mm, Pitch 0.50mm, Thermal Pad 0.70x0.70mm, IPC Medium Density"
  rrect50% 0.7x0.25 smd mask+0.05: 1(-3.325,3.75) 2(-3.325,3.25) 3(-3.325,2.75) 4(-3.325,1.75) 4(-3.325,2.25) 5(-3.325,2.706) 5(-3.325,3.206) 5(-3.325,3.706) 5(-3.325,4.206) 6(-3.325,-3.25) 6(-3.325,-2.75) 6(-3.325,-2.25) 6(-3.325,-1.75) 6(-3.325,-1.25) 6(-3.325,-0.75) 7(-3.325,-3.75) 8(-0.65,-4.1) 8(-0.15,-4.1) 9(1.575,-4.1) 10(3.325,-3.75) 11(3.325,-3.25) 11(3.325,-2.75) 11(3.325,-2.25) 11(3.325,-1.75) 11(3.325,-1.25) 11(3.325,-0.75) 11(3.325,-0.25) 11(3.325,0.25) 11(3.325,0.75) 12(3.325,1.25) 12(3.325,1.75) 13(3.325,2.25) 13(3.325,2.75) 14(3.325,6.206) 15(3.325,3.75) 18(-0.64,7.056) 18(-0.15,7.056)
  rrect50% 0.25x0.7 smd mask+0.05: 1(-2.775,4.325) 4(-3.1,1.98) 5(-3.1,2.956) 5(-3.1,3.486) 5(-3.1,3.946) 6(-3.1,-3.01) 6(-3.1,-2.46) 6(-3.1,-1.95) 6(-3.1,-1.48) 6(-3.1,-0.99) 7(-2.775,-4.325) 8(-0.895,-4.325) 8(-0.395,-4.325) 8(0.105,-4.325) 9(1.33,-4.325) 9(1.83,-4.325) 10(2.775,-4.325) 11(3.1,-3.01) 11(3.1,-2.51) 11(3.1,-2.03) 11(3.1,-1.51) 11(3.1,-1.06) 11(3.1,-0.53) 11(3.1,-0.01) 11(3.1,0.48) 12(3.1,1.5) 13(3.1,2.48) 15(2.775,4.325) 16(1.83,4.325) 17(1.33,4.325) 18(-0.895,7.281) 18(-0.395,7.281) 18(0.105,7.281)
  Top Layer region: 2.75,-4.55 3.55,-4.55 3.55,-3.73 2.75,-3.73
  Top Layer region: 1.33,-4.675 1.83,-4.675 1.83,-4.075 1.33,-4.075
  Top Layer region: -3.55,-4.55 0.635,-4.55 0.635,-0.75 -3.55,-0.75
  Top Layer region: -3.244,3.625 -2.649,3.625 -2.649,4.245 -3.244,4.245
  Top Layer region: -3.244,-4.245 -2.649,-4.245 -2.649,-3.625 -3.244,-3.625
  Top Layer region: 3.245,-3.625 2.65,-3.625 2.65,-4.245 3.245,-4.245
  Top Layer region: 3.245,4.245 2.65,4.245 2.65,3.625 3.245,3.625
  Top Layer region: -3.54,3.625 -2.649,3.625 -2.649,4.55 -3.54,4.55
  Top Layer region: -3.55,1.7 -3.05,1.7 -3.05,2.25 -3.55,2.25
  Top Layer region: 1.035,-0.719 2.34,-0.719 2.34,2.946 1.035,2.946
  Top Layer region: -3.55,2.726 2.325,2.726 2.325,4.206 -3.55,4.206
  Top Layer region: -2.34,3.916 0.69,3.916 0.69,7.506 -2.34,7.506
  Top Layer region: 0.45,3.916 2.325,3.916 2.325,6.631 0.45,6.631
  Top Layer region: 3.095,-3.27 3.675,-3.27 3.675,0.73 3.095,0.73
  Top Layer region: 3.115,2.25 3.675,2.25 3.675,2.74 3.115,2.74
  Top Layer region: 3.125,1.25 3.675,1.25 3.675,1.75 3.125,1.75
  Top Layer region: 2.78,3.77 3.55,3.77 3.55,4.55 2.78,4.55
  Top Layer lines w0.25: -3.55,1.75 -3.55,2.25 ; -3.55,3.75 -3.55,4.55 ; -3.54,4.55 -2.78,4.55 ; 0.79,2.706 -3.55,2.706 -3.55,4.206 -2.38,4.206 -2.34,4.206 -2.34,7.506 0.625,7.506 0.625,6.631 2.325,6.631 2.325,-0.719 1.035,-0.719 1.035,2.706 ; 2.775,-4.55 3.55,-4.55 3.55,-3.75 ; 2.78,4.55 3.55,4.55 3.55,3.77 ; -3.55,-4.55 -3.55,-0.75 0.62,-0.75 0.625,-0.755 0.635,-0.755 0.635,-4.55 -3.55,-4.55
  Top Layer lines w0.254: -2.63,4.203 ccw(c-2.63,4.496) -2.337,4.496 ; 0.74,2.709 cw(c0.74,2.416) 1.033,2.416
  silkscreen extent -4.5,-4.72 3.73,4.72, body extent -3.57,-4.57 3.57,4.57, height 4.1
QFN50P700X900X410_HS-55N#2 [mm] "QFN, 54-Leads, Body 7.00x9.00mm, Pitch 0.50mm, Thermal Pad 0.70x0.70mm, IPC Medium Density"
  rrect50% 0.7x0.25 smd mask+0.05: 1(-3.325,3.75) 2(-3.325,3.25) 3(-3.325,2.75) 4(-3.325,1.75) 4(-3.325,2.25) 5(-3.325,2.706) 5(-3.325,3.206) 5(-3.325,3.706) 5(-3.325,4.206) 6(-3.325,-0.294) 6(-3.325,0.206) 6(-3.325,0.706) 6(-3.325,1.206) 6(-3.325,1.706) 6(-3.325,2.206) 7(-3.325,-0.794) 8(-0.65,-1.144) 8(-0.15,-1.144) 9(1.575,-4.1) 10(3.325,-3.75) 11(3.325,-3.25) 11(3.325,-2.75) 11(3.325,-2.25) 11(3.325,-1.75) 11(3.325,-1.25) 11(3.325,-0.75) 11(3.325,-0.25) 11(3.325,0.25) 11(3.325,0.75) 12(3.325,1.25) 12(3.325,1.75) 13(3.325,2.25) 13(3.325,2.75) 14(3.325,6.206) 15(3.325,3.75) 18(-0.64,7.056) 18(-0.15,7.056)
  rrect50% 0.25x0.7 smd mask+0.05: 1(-2.775,4.325) 4(-3.1,1.98) 5(-3.1,2.956) 5(-3.1,3.486) 5(-3.1,3.946) 6(-3.1,-0.054) 6(-3.1,0.496) 6(-3.1,1.006) 6(-3.1,1.476) 6(-3.1,1.966) 7(-2.775,-1.369) 8(-0.895,-1.369) 8(-0.395,-1.369) 8(0.105,-1.369) 9(1.33,-4.325) 9(1.83,-4.325) 10(2.775,-4.325) 11(3.1,-3.01) 11(3.1,-2.51) 11(3.1,-2.03) 11(3.1,-1.51) 11(3.1,-1.06) 11(3.1,-0.53) 11(3.1,-0.01) 11(3.1,0.48) 12(3.1,1.5) 13(3.1,2.48) 15(2.775,4.325) 16(1.83,4.325) 17(1.33,4.325) 18(-0.895,7.281) 18(-0.395,7.281) 18(0.105,7.281)
  Top Layer region: 2.75,-4.55 3.55,-4.55 3.55,-3.73 2.75,-3.73
  Top Layer region: 1.33,-4.675 1.83,-4.675 1.83,-4.075 1.33,-4.075
  Top Layer region: -3.55,-1.594 0.635,-1.594 0.635,2.206 -3.55,2.206
  Top Layer region: -3.244,3.625 -2.649,3.625 -2.649,4.245 -3.244,4.245
  Top Layer region: -3.244,-1.289 -2.649,-1.289 -2.649,-0.669 -3.244,-0.669
  Top Layer region: 3.244,-3.625 2.649,-3.625 2.649,-4.245 3.244,-4.245
  Top Layer region: 3.245,4.245 2.65,4.245 2.65,3.625 3.245,3.625
  Top Layer region: -3.54,3.625 -2.649,3.625 -2.649,4.55 -3.54,4.55
  Top Layer region: -3.55,1.7 -3.05,1.7 -3.05,2.25 -3.55,2.25
  Top Layer region: 1.035,-0.719 2.34,-0.719 2.34,2.946 1.035,2.946
  Top Layer region: -3.55,2.726 2.325,2.726 2.325,4.206 -3.55,4.206
  Top Layer region: -2.34,3.916 0.69,3.916 0.69,7.506 -2.34,7.506
  Top Layer region: 0.45,3.916 2.325,3.916 2.325,6.631 0.45,6.631
  Top Layer region: 3.095,-3.27 3.675,-3.27 3.675,0.73 3.095,0.73
  Top Layer region: 3.115,2.25 3.675,2.25 3.675,2.74 3.115,2.74
  Top Layer region: 3.125,1.25 3.675,1.25 3.675,1.75 3.125,1.75
  Top Layer region: 2.78,3.77 3.55,3.77 3.55,4.55 2.78,4.55
  Top Layer lines w0.25: -3.55,1.75 -3.55,2.25 ; -3.55,3.75 -3.55,4.55 ; -3.54,4.55 -2.78,4.55 ; 0.79,2.706 -3.55,2.706 -3.55,4.206 -2.38,4.206 -2.34,4.206 -2.34,7.506 0.625,7.506 0.625,6.631 2.325,6.631 2.325,-0.719 1.035,-0.719 1.035,2.706 ; 2.775,-4.55 3.55,-4.55 3.55,-3.75 ; 2.78,4.55 3.55,4.55 3.55,3.77 ; -3.55,-1.594 -3.55,2.206 0.62,2.206 0.625,2.201 0.635,2.201 0.635,-1.594 -3.55,-1.594
  Top Layer lines w0.254: -2.63,4.203 ccw(c-2.63,4.496) -2.337,4.496 ; 0.74,2.709 cw(c0.74,2.416) 1.033,2.416
  silkscreen extent -4.5,-4.72 3.73,4.72, body extent -3.57,-4.57 3.57,4.57, height 4.1
SB5100 [mil]
  oval 177x88.5 hole 59: A(300,0) C(-300,0)
  silkscreen extent -200,-110 235,110
"SMA Straight PCB" [mm]
  round 1.5 smd: 1(0,0)
  round 2.55 hole 1.7: P1(-2.54,5.496) P2(2.54,5.496) P3(2.54,0.416) P4(-2.54,0.416)
  silkscreen extent -1.4,-3.5 1.4,3.5
SOIC127P370X94-2N#1 [mm] "SOIC, 2-Leads, Body 1.60x2.69mm, Pitch 1.27mm, IPC Medium Density"
  rect 0.9x0.8 smd: A(4.806,0) C(1.106,0)
  silkscreen extent -1.97,-0.9 1,1.07, body extent -1.4,-0.9 1.4,0.9, height 1.35
SOIC127P370X94-2N#2 [mm] "SOIC, 2-Leads, Body 1.60x2.69mm, Pitch 1.27mm, IPC Medium Density"
  rect 0.9x0.8 smd: A(4.806,0) C(-1.85,0)
  silkscreen extent -1.97,-0.9 1,1.07, body extent -1.4,-0.9 1.4,0.9, height 1.35
SOT95P280X145-6N [mil]
  rect 50x22 smd: 1(-51,37) 2(-51,116.38) 3(-51,-37) 4(51,-37) 5(51,0) 6(51,37)
  silkscreen extent -21,48 21,60
SOT-23-3 [mm]
  rect 1x0.6 smd: 1(-1.2,0.95) 2(-1.2,-0.95) 3(1.2,2.956)
  silkscreen extent -1.32,-1.5 0.7,1.92, body extent -0.7,-1.5 0.7,1.5, height 1.1
TSQFP50P900X900X160-48N [mm] "TSQFP, 48-Leads, Body 7.00x7.00mm, Pitch 0.50mm, IPC Medium Density"
  oval 1.45x0.3 smd: 1(-4.225,5.706) 2(-4.225,2.25) 3(-4.225,1.75) 4(-4.225,1.25) 5(-4.225,0.75) 6(-4.225,0.25) 7(-4.225,2.706) 8(-4.225,2.206) 9(-4.225,-1.25) 10(-4.225,-1.75) 11(-4.225,-2.25) 12(-4.225,-2.75) 25(4.225,-2.75) 26(4.225,-2.25) 27(4.225,-1.75) 28(4.225,-1.25) 29(4.225,-0.75) 30(4.225,-0.25) 31(4.225,0.25) 32(4.225,0.75) 33(4.225,1.25) 34(4.225,4.706) 35(4.225,5.206) 36(4.225,5.706)
  oval 0.3x1.45 smd: 13(-2.75,-4.225) 14(-2.25,-4.225) 15(-1.75,-4.225) 16(-1.25,-4.225) 17(-0.75,-4.225) 18(-0.25,-4.225) 19(0.25,-4.225) 20(0.75,-4.225) 21(1.25,-4.225) 22(1.75,-4.225) 23(2.25,-1.269) 24(2.75,-1.269) 37(2.75,7.181) 38(2.25,4.225) 39(1.75,7.181) 40(1.25,4.225) 41(0.75,4.225) 42(0.25,4.225) 43(-0.25,4.225) 44(-0.75,4.225) 45(-1.25,4.225) 46(-1.75,4.225) 47(-2.25,7.181) 48(-2.75,7.181)
  silkscreen extent -4.35,-3.1 3.1,3.57, body extent -3.5,-3.5 3.5,3.5, height 1.6